# EAGLE board circuito_tesi (EAGLE 9.6.2)
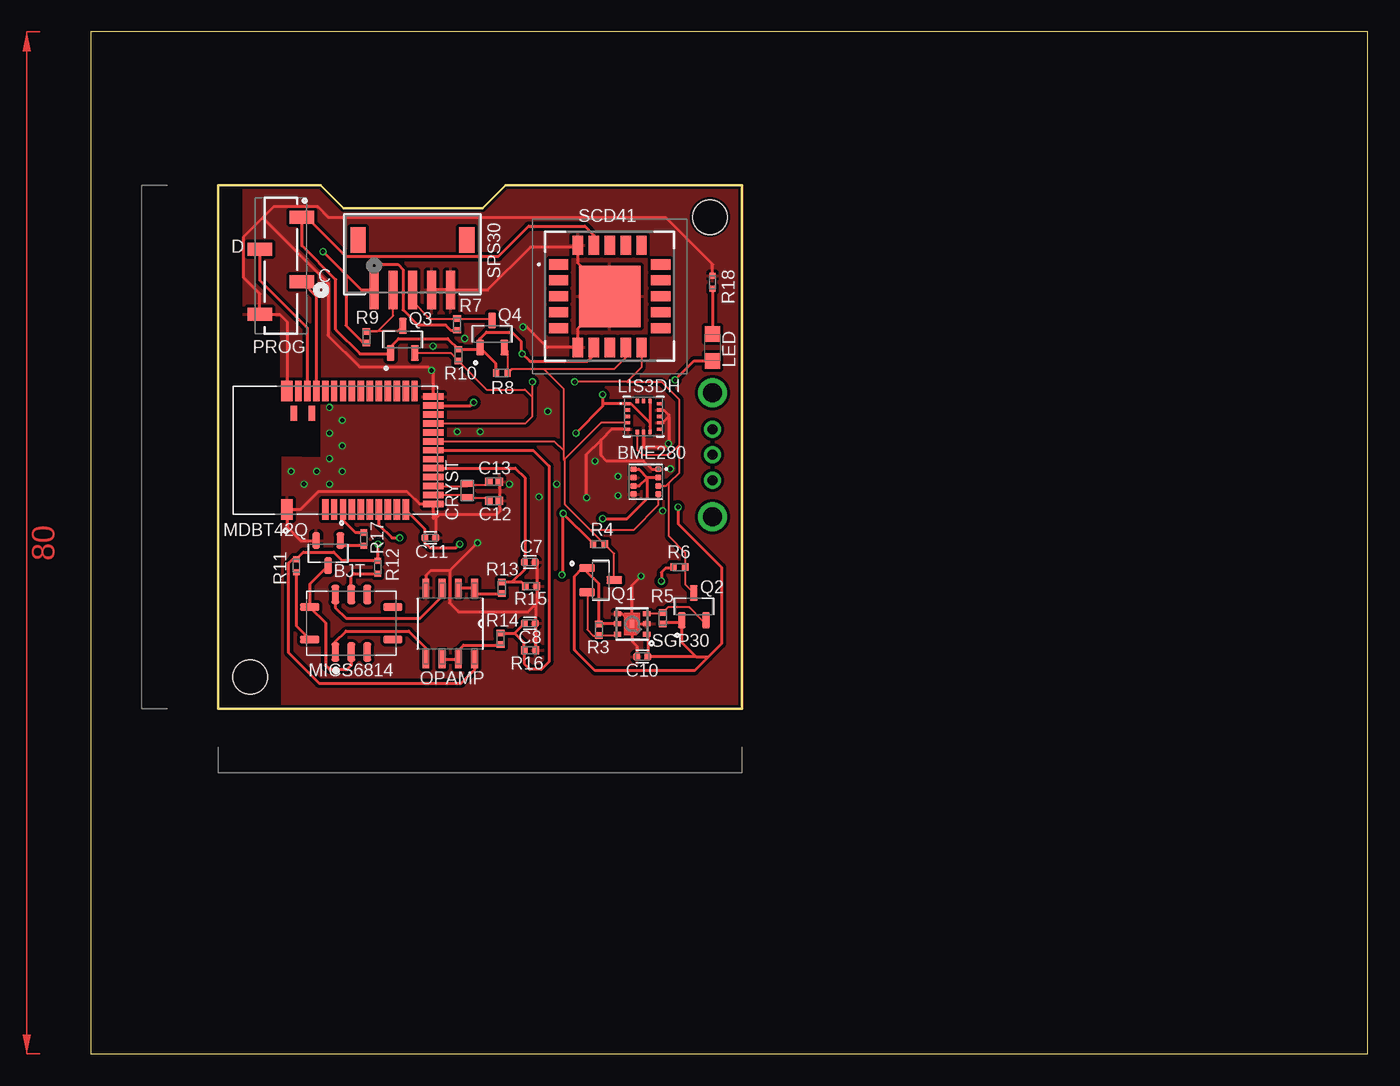
[diagram p0: board, top side]
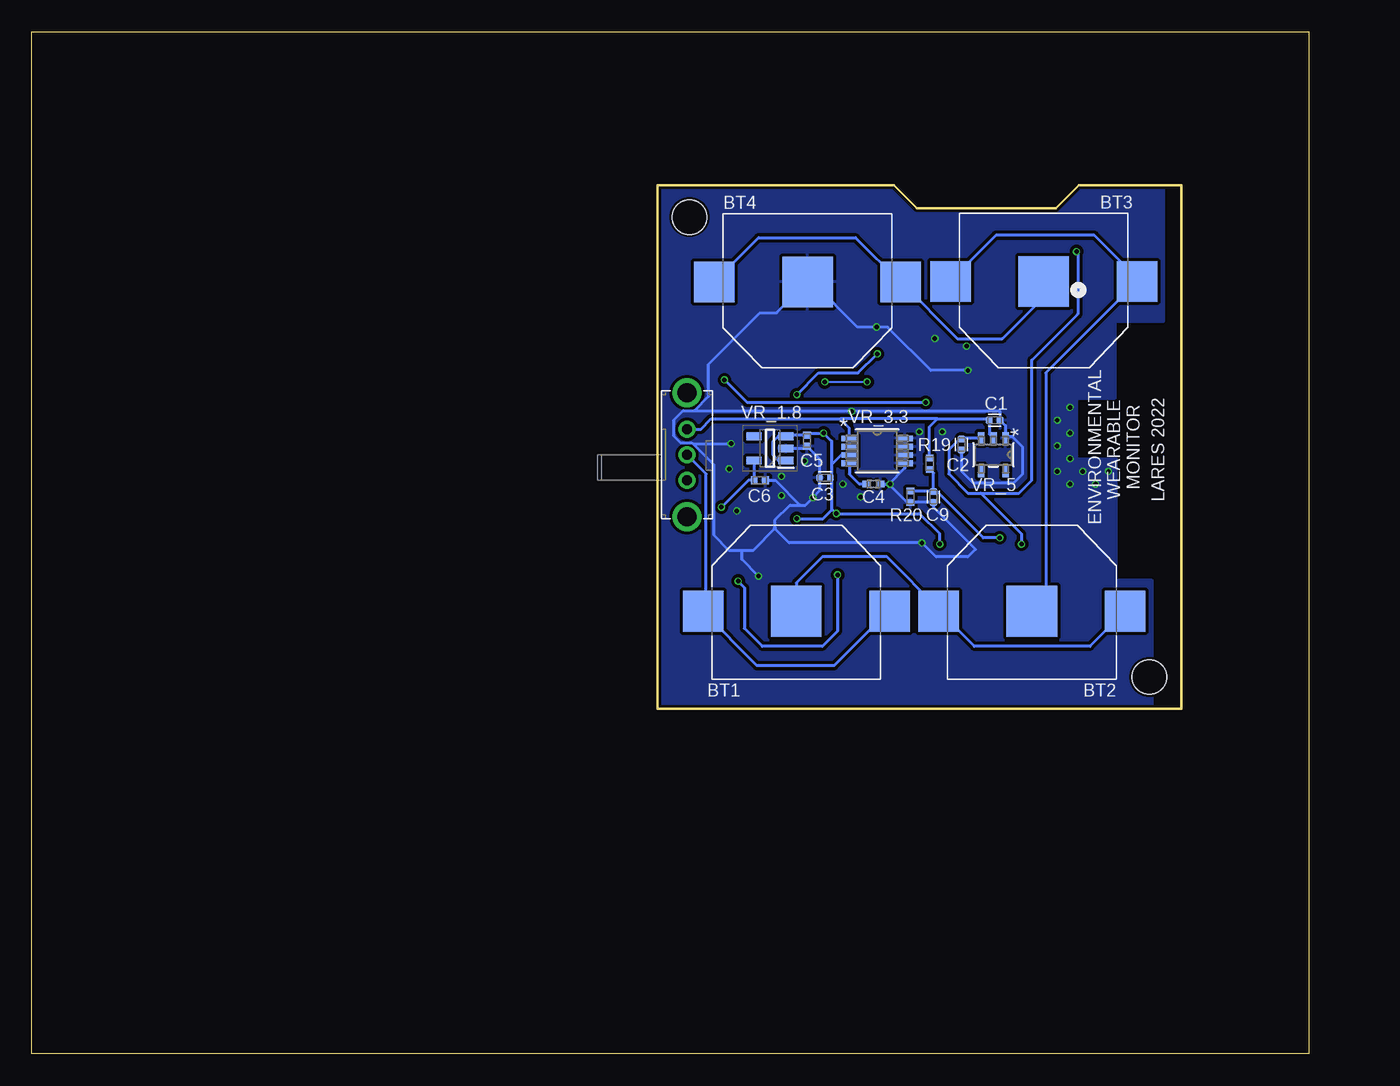
[diagram p1: board, bottom side, seen from below]

Size 100 x 80 mm. Coordinates in mm from the lower left corner, seen from the top.
Outline: 0,0 100,0 100,80 0,80 0,0
Outline: 10,68 10,27 51,27 51,68 32.5,68 30.7,66.2 19.8,66.2 18,68 10,68
Copper layers (1+2*15+16): Top 0.035mm / dielectric 0.18mm / layer 2 0.017mm / dielectric 1.12mm / layer 15 0.017mm / dielectric 0.18mm / Bottom 0.035mm
Design rules "DRC May 2022": minimum track width 3.5mil, minimum drill 0.35mm, track to track 0.25mm, track to pad 0.14mm, pad to pad 0.14mm, via to via 0.14mm, smd to smd 0.14mm, copper to edge 0.201mm, drill to drill 6mil, minimum pad ring 10mil, minimum via ring 0.1mm, stop-mask expansion 0.014mm, vias tented up to drill 1mm, thermal gap 10mil
Holes 2.7 mm at 12.5,29.5 48.5,65.5

## Footprints (pad centres in the part's own frame; a part is rotated, then mirrored left to right if it is on the bottom)
SOT95P230X110-3N = smd 1.26 x 0.59: 1 -0.98,0.95; 2 -0.98,-0.95; 3 0.98,0
PSON65P250X250X100-8N = smd 0.49 x 0.45: 1 0.97,0.975; 2 0.97,0.325; 3 0.97,-0.325; 4 0.97,-0.975; 5 -0.97,-0.975; 6 -0.97,-0.325; 7 -0.97,0.325; 8 -0.97,0.975
BAT_2996TR = smd 3.96 x 3.96: - 0,0 | smd 3.18 x 3.18: S+1 -7.3,0; S+2 7.3,0
CAPC1005X55N = smd 0.54 x 0.6: 1 -0.43,0; 2 0.43,0
CAP_CL05_SAM = smd 0.606 x 0.5: 1 -0.553,0; 2 0.553,0
CAPC1005X55N' = smd 0.54 x 0.6: 1 -0.432,0; 2 0.432,0
CAPC1005X56N = smd 0.59 x 0.63: 1 -0.42,0; 2 0.42,0
XTAL_ECS-.327-9-16-TR = smd 0.5 x 1: 1 -0.55,0; 2 0.55,0
DIOC200X125X110 = smd 1.2 x 1.2: + 1.05,0; - -1.05,0
STMICROELECTRONICS_LIS3DH_0 = smd 0.35 x 0.25: 1 -1.225,1; 2 -1.225,0.5; 3 -1.225,0; 4 -1.225,-0.5; 5 -1.225,-1; 9 1.225,-1; 10 1.225,-0.5; 11 1.225,0; 12 1.225,0.5; 13 1.225,1 | smd 0.25 x 0.35: 6 -0.5,-1.225; 7 0,-1.225; 8 0.5,-1.225; 14 0.5,1.225; 15 0,1.225; 16 -0.5,1.225
XCVR_317030213 = smd 1.6 x 0.9: 1 -4.65,3.8; 39 4.65,3.8 | smd 1.6 x 0.5: 2 -4.65,0.8; 3 -4.65,0.1; 4 -4.65,-0.6; 5 -4.65,-1.3; 6 -4.65,-2; 7 -4.65,-2.7; 8 -4.65,-3.4; 9 -4.65,-4.1; 10 -4.65,-4.8; 11 -4.65,-5.5; 25 4.65,-6.2; 26 4.65,-5.5; 27 4.65,-4.8; 28 4.65,-4.1; 29 4.65,-3.4; 30 4.65,-2.7; 31 4.65,-2; 32 4.65,-1.3; 33 4.65,-0.6; 34 4.65,0.1; 35 4.65,0.8; 36 4.65,1.5; 37 4.65,2.2; 38 4.65,2.9 | smd 0.5 x 1.6: 12 -4.2,-7.65; 13 -3.5,-7.65; 14 -2.8,-7.65; 15 -2.1,-7.65; 16 -1.4,-7.65; 17 -0.7,-7.65; 18 0,-7.65; 19 0.7,-7.65; 20 1.4,-7.65; 21 2.1,-7.65; 22 2.8,-7.65; 23 3.5,-7.65; 24 4.2,-7.65 | smd 1.2 x 0.5: 40 2.9,3.25; 41 2.9,1.85
SENSOR_MICS-6814 = smd 1.5 x 0.6: A -2.25,1.25; B -2.25,0; C -2.25,-1.25; F 2.25,-1.25; G 2.25,0; H 2.25,1.25 | smd 0.6 x 1.5: D -1.27,-3.25; E 1.27,-3.25; J 1.27,3.25; K -1.27,3.25
SOIC127P600X175-8N = smd 1.422 x 0.533: 1 -2.794,1.905; 2 -2.794,0.635; 3 -2.794,-0.635; 4 -2.794,-1.905; 5 2.794,-1.905; 6 2.794,-0.635; 7 2.794,0.635; 8 2.794,1.905
GCT_BG306-04-A-1-0400-X-X_REVD = smd 1.02 x 1.9: 1 -3.81,1.65; 2 -1.27,-1.65; 3 1.27,1.65; 4 3.81,-1.65
SOT95P240X111-3N = smd 1.23 x 0.6: 1 -1.06,0.95; 2 -1.06,-0.95; 3 1.06,0
RESC1005X37N = smd 0.49 x 0.6: 1 -0.457,0; 2 0.457,0
RES_ERJPA2F1300X = smd 0.475 x 0.5: 1 -0.512,0; 2 0.512,0
RES_ERJPA2J821X = smd 0.475 x 0.5: 1 -0.512,0; 2 0.512,0
RESC1005X40N = smd 0.51 x 0.6: 1 -0.445,0; 2 0.445,0
RES_ERJPA2F5101X = smd 0.475 x 0.5: 1 -0.512,0; 2 0.512,0
RES_ERA2AEB331X = smd 0.475 x 0.5: 1 -0.512,0; 2 0.512,0
SW_EG1213 = drill 0.8: 1 -2,0; 2 0,0; 3 2,0 | drill 1.5: P$4 -4.85,0; P$5 4.85,0
SCD41DR2 = smd 1.5 x 0.8: 1 -4,2.5; 2 -4,1.25; 3 -4,0; 4 -4,-1.25; 5 -4,-2.5; 11 4,-2.5; 12 4,-1.25; 13 4,0; 14 4,1.25; 15 4,2.5 | smd 0.8 x 1.5: 6 -2.5,-4; 7 -1.25,-4; 8 0,-4; 9 1.25,-4; 10 2.5,-4; 16 2.5,4; 17 1.25,4; 18 0,4; 19 -1.25,4; 20 -2.5,4 | smd 4.8 x 4.8: 21 0,0
SGP30 = smd 0.55 x 0.4: 1 -1.15,0.8; 2 -1.15,0; 3 -1.15,-0.8; 4 1.15,-0.8; 5 1.15,0; 6 1.15,0.8 | smd 0.305 x 0.61: DIEPAD 0,0
CONN_S5B-ZR-SM4A-TF_JST = smd 0.711 x 2.997: 1 0,0; 2 1.5,0; 3 3,0; 4 4.5,0; 5 6,0 | smd 1.194 x 2.007: 6 -1.25,3.902; 7 7.25,3.902
SOT95P275X130-5N = smd 1.2 x 0.6: 1 -1.25,0.95; 2 -1.25,0; 3 -1.25,-0.95; 4 1.25,-0.95; 5 1.25,0.95
MSOP-8LD-PL-1_MCH = smd 1.257 x 0.457: 1 -2.178,0.975; 2 -2.178,0.325; 3 -2.178,-0.325; 4 -2.178,-0.975; 5 2.178,-0.975; 6 2.178,-0.325; 7 2.178,0.325; 8 2.178,0.975
TSOT23-5_ONS = smd 0.953 x 0.508: 1 -1.276,0.95; 2 -1.276,0; 3 -1.276,-0.95; 4 1.276,-0.95; 5 1.276,0.95

## Placement (x,y rotation side)
BJT  MMBT3904-215  [SOT95P230X110-3N]  18.6,39.2 270 top
BME280  BME280  [PSON65P250X250X100-8N]  43.48,44.79 0 top
BT1  2996TR  [BAT_2996TR]  40.14,34.65 180 bottom
BT2  2996TR  [BAT_2996TR]  21.69,34.65 180 bottom
BT3  2996TR  [BAT_2996TR]  20.76,60.45 0 bottom
BT4  2996TR  [BAT_2996TR]  39.26,60.43 0 bottom
C1  C0402C104K9RACAUTO  [CAPC1005X55N]  24.6,49.6 0 bottom
C2  C0402C104K9RACAUTO  [CAPC1005X55N]  27.2,47.7 270 bottom
C3  CL05A225MQ5NNNC  [CAPC1005X55N]  37.9,45.1 180 bottom
C4  CL05B471KB5NNNCCAP_CL05_SAM  [CAP_CL05_SAM]  34.1,44.6 180 bottom
C5  JMK105BJ105KV-F  [CAPC1005X55N']  39.3,48 90 bottom
C6  JMK105BJ105KV-F  [CAPC1005X55N']  43,44.9 180 bottom
C7  CL05B103KO5NNNC  [CAPC1005X55N]  34.4,38.5 180 top
C8  CL05B103KO5NNNC  [CAPC1005X55N]  34.4,33.7 0 top
C9  CL05B103KO5NNNC  [CAPC1005X55N]  29.4,43.6 270 bottom
C10  C0402C104K9RACAUTO  [CAPC1005X55N]  43.2,31.1 0 top
C11  CL05A106MP5NUNC  [CAPC1005X55N]  26.6,40.4 180 top
C12  04025A120FAT2A  [CAPC1005X56N]  31.6,43.3 180 top
C13  04025A120FAT2A  [CAPC1005X56N]  31.6,44.8 180 top
CRYST  ECS-.327-9-16-TR  [XTAL_ECS-.327-9-16-TR]  29.5,44.1 270 top
LED  LTST-C170KRKT  [DIOC200X125X110]  48.7,55.3 270 top
LIS3DH  STMICROELECTRONICS_LIS3DHSTMICROELECTRONICS_LIS3DH_0_0  [STMICROELECTRONICS_LIS3DH_0]  43.3,49.9 0 top
MDBT42Q  317030213  [XCVR_317030213]  19.17,47.25 90 top
MICS6814  MICS-6814  [SENSOR_MICS-6814]  20.41,33.71 90 top
OPAMP  TSV912IDT  [SOIC127P600X175-8N]  28.16,33.68 270 top
PROG  BG306-04-A-1-0400-X-X_REVD  [GCT_BG306-04-A-1-0400-X-X_REVD]  14.9,61.7 270 top
Q1  BSS138  [SOT95P240X111-3N]  39.94,37.09 0 top
Q2  BSS138  [SOT95P240X111-3N]  47.24,35.01 90 top
Q3  BSS138  [SOT95P240X111-3N]  24.44,55.93 90 top
Q4  BSS138  [SOT95P240X111-3N]  31.44,56.35 90 top
R3  MCS0402MC1002FE000  [RESC1005X37N]  39.8,33.2 270 top
R4  MCS0402MC1002FE000  [RESC1005X37N]  39.8,39.9 0 top
R5  MCS0402MC1002FE000  [RESC1005X37N]  44.8,34.1 270 top
R6  MCS0402MC1002FE000  [RESC1005X37N]  46.1,38.1 180 top
R7  MCS0402MC1002FE000  [RESC1005X37N]  28.7,57.1 90 top
R8  MCS0402MC1002FE000  [RESC1005X37N]  32.2,53.3 0 top
R9  MCS0402MC1002FE000  [RESC1005X37N]  21.6,56.1 270 top
R10  MCS0402MC1002FE000  [RESC1005X37N]  28.8,54.7 90 top
R11  ERJPA2F1300X  [RES_ERJPA2F1300X]  16.1,38.2 90 top
R12  ERJPA2J821X  [RES_ERJPA2J821X]  22.5,38.1 90 top
R13  ERJ-2GEJ515X  [RESC1005X40N]  32.2,36.5 270 top
R14  ERJ-2GEJ515X  [RESC1005X40N]  32.1,32.5 270 top
R15  ERJ-2GEJ106X  [RESC1005X40N]  34.5,36.6 0 top
R16  ERJ-2GEJ106X  [RESC1005X40N]  34.4,31.6 180 top
R17  ERJPA2F5101X  [RES_ERJPA2F5101X]  21.4,40.3 270 top
R18  ERA2AEB331X  [RES_ERA2AEB331X]  48.7,60.4 270 top
R19  ERJ-2GEJ515X  [RESC1005X40N]  29.7,46.2 270 bottom
R20  ERJ-2GEJ515X  [RESC1005X40N]  31.2,43.6 90 bottom
S1  EG1213  [SW_EG1213]  48.7,46.9 270 bottom
SCD41  SCD41-D-R2  [SCD41DR2]  40.65,59.3 0 top
SGP30  SGP30  [SGP30]  42.4,33.66 180 top
SPS30  S5B-ZR-SM4A-TF_(LF)_(SN)CONN_S5B-ZR-SM4A-TF_JST  [CONN_S5B-ZR-SM4A-TF_JST]  22.2,59.8 0 top
VR_1.8  S-1318D18-M5T1U4  [SOT95P275X130-5N]  42.2,47.4 180 bottom
VR_3.3  MIC5219-3.3YMMMSOP-8LD-PL-1_MCH  [MSOP-8LD-PL-1_MCH]  33.8,47.2 0 bottom
VR_5  MC78LC50NTRGTSOT23-5_ONS  [TSOT23-5_ONS]  24.7,46.9 270 bottom

## Library data of the parts
BJT = BJT_TO-236; DESCRIPTION: Bipolar (BJT) Transistor NPN 40 V 200 mA 300MHz 250 mW Surface Mount TO-236AB; DIGI-KEY_PART_NUMBER: 1727-4044-2-ND; MF: Nexperia USA; MP: MMBT3904,215; PACKAGE: SOT23-3 Nexperia USA Inc.; PURCHASE-URL: https://pricing.snapeda.com/search/part/MMBT3904,215/?ref=eda
BME280 = BME280; AVAILABILITY: In Stock; DESCRIPTION: Board Mount Humidity Sensors MEMS humidity, pressure and temperature sensor; MF: Bosch; MP: BME280; PACKAGE: LGA-8 Bosch; PRICE: None; PURCHASE-URL: https://pricing.snapeda.com/search/part/BME280/?ref=eda
BT1-BT4 = Battery_holder; DESCRIPTION: SMT Holder for 11.6mm Cell-Tin Nickel Plated on T&R; DIGI-KEY_PART_NUMBER: 36-2996TR-ND; MF: Keystone Electronics; MP: 2996TR; PACKAGE: None; PURCHASE-URL: https://pricing.snapeda.com/search/part/2996TR/?ref=eda
C1 C2 C10 = Cond_100n_0402; DESCRIPTION: 0.1 µF ±10% 6.3V Ceramic Capacitor X7R 0402 (1005 Metric); DIGI-KEY_PART_NUMBER: 399-19367-2-ND; MF: KEMET; MP: C0402C104K9RACAUTO; PACKAGE: 0402 KEMET; PURCHASE-URL: https://pricing.snapeda.com/search/part/C0402C104K9RACAUTO/?ref=eda
C3 = Cond_2,2u_0402; DESCRIPTION: 2.2 µF ±20% 6.3V Ceramic Capacitor X5R 0402 (1005 Metric); DIGI-KEY_PART_NUMBER: 1276-1469-2-ND; MF: Samsung; MP: CL05A225MQ5NNNC; PACKAGE: 0402 Samsung; PURCHASE-URL: https://pricing.snapeda.com/search/part/CL05A225MQ5NNNC/?ref=eda
C4 = Cond_470p_0402; COPYRIGHT: Copyright (C) 2022 Ultra Librarian. All rights reserved.; DIGI-KEY_PART_NUMBER_1: 1276-1566-2-ND; DIGI-KEY_PART_NUMBER_2: 1276-1566-1-ND; DIGI-KEY_PART_NUMBER_3: 1276-1566-6-ND; MANUFACTURER_PART_NUMBER: CL05B471KB5NNNC; MFR_NAME: Samsung
C5 C6 = Cond_1u_0402; DESCRIPTION: 1 µF ±10% 6.3V Ceramic Capacitor X5R 0402 (1005 Metric); DIGI-KEY_PART_NUMBER: 587-1231-2-ND; MF: Taiyo Yuden; MP: JMK105BJ105KV-F; PACKAGE: 1005 Taiyo Yuden; PURCHASE-URL: https://pricing.snapeda.com/search/part/JMK105BJ105KV-F/?ref=eda
C7-C9 = Cond_10n_0402; DESCRIPTION: 10000 pF ±10% 16V Ceramic Capacitor X7R 0402 (1005 Metric); DIGI-KEY_PART_NUMBER: 1276-1051-2-ND; MF: Samsung Electro-Mechanics; MP: CL05B103KO5NNNC; PACKAGE: 0402 Samsung; PURCHASE-URL: https://pricing.snapeda.com/search/part/CL05B103KO5NNNC/?ref=eda
C11 = Cond_10u_0402; DESCRIPTION: 10 µF ±20% 10V Ceramic Capacitor X5R 0402 (1005 Metric); DIGI-KEY_PART_NUMBER: 1276-1450-2-ND; MF: Samsung; MP: CL05A106MP5NUNC; PACKAGE: 0402 Samsung; PURCHASE-URL: https://pricing.snapeda.com/search/part/CL05A106MP5NUNC/?ref=eda
C12 C13 = Cond_12p_0402; DESCRIPTION: 12 pF ±1% 50V Ceramic Capacitor C0G, NP0 0402 (1005 Metric); DIGI-KEY_PART_NUMBER: 478-10087-2-ND; MF: AVX; MP: 04025A120FAT2A; PACKAGE: 1005 AVX; PURCHASE-URL: https://pricing.snapeda.com/search/part/04025A120FAT2A/?ref=eda
CRYST = Crystal-ECS-.327-9-16-TR; DESCRIPTION: 32.768 kHz ±20ppm Crystal 9pF 90 kOhms 2-SMD, No Lead; DIGI-KEY_PART_NUMBER: XC2132TR-ND; MF: ECS Inc.; MP: ECS-.327-9-16-TR; PACKAGE: SMD-2 ECS International; PURCHASE-URL: https://pricing.snapeda.com/search/part/ECS-.327-9-16-TR/?ref=eda
LED = LED_R_LTST-C170KRKT; DESCRIPTION: Red 631nm LED Indication - Discrete 2V 0805 (2012 Metric); DIGI-KEY_PART_NUMBER: 160-1415-2-ND; MF: Lite-On Inc.; MP: LTST-C170KRKT; PACKAGE: None; PURCHASE-URL: https://pricing.snapeda.com/search/part/LTST-C170KRKT/?ref=eda
LIS3DH = STMicroelectronics - LIS3DH; BANDWIDTH: 5 kHz; CIIVA_IDS: 978556; COMPONENT_LINK_1_DESCRIPTION: Manufacturer URL; COMPONENT_LINK_1_URL: http://www.st.com/; COMPONENT_LINK_3_DESCRIPTION: Package Specification; COMPONENT_LINK_3_URL: http://www.st.com/st-web-ui/static/active/en/resource/technical/document/datasheet/CD00274221.pdf; CURRENT_CONSUMPTION_IN_POWER_DOWN_MODE: 0.5 uA; DATASHEET: http://www.st.com/st-web-ui/static/active/en/resource/technical/document/datasheet/CD00274221.pdf; DATASHEET_VERSION: Rev. 1; FOOTPRINT_VARIANT_NAME_0: Manufacturer Recommended; IMPORTED: yes; IMPORTED_FROM: vault; IMPORT_TS: 1521860055; INTERFACE: I2C, SPI; MF: STMicroelectronics; MOUNTING_TECHNOLOGY: Surface Mount; MPN: LIS3DH; OPERATING_TEMPERATURE: -40 to 85 degC; OUTPUT_TYPE: Digital; PACKAGE: LGA-16; PACKAGE_DESCRIPTION: 16-Pin Land Grid Array, Body 3 x 3 mm, Pitch 0.5 mm; PACKING: Tray; PIN_0_0_3_INSIDE_EDGE: clock; PREFIX: U; RELEASE_DATE: 1506332602; ROHS: Yes; VAULT_GUID: 35EBCE1D-2944-446E-95F1-4BAFD91B2D9D; VAULT_REVISION: 2E44ACB8-410E-4D5A-8B6F-2E9483856AF3; WIDE_SUPPLY_VOLTAGE: 1.71 to 3.6 V
MDBT42Q = Raytac_nRF52; DESCRIPTION: Bluetooth Bluetooth v4.2 Transceiver Module 2.4GHz Integrated, Chip Surface Mount; DIGI-KEY_PART_NUMBER: 1597-1434-ND; MF: Seeed Technology; MP: 317030213; PACKAGE: SMD-41 Seeed Studio; PURCHASE-URL: https://pricing.snapeda.com/search/part/317030213/?ref=eda
MICS6814 = MICS-6814; AVAILABILITY: Not in stock; DESCRIPTION: MiCS-6814 Air Quality Sensor mikroBUS™ Click™ Platform Evaluation Expansion Board; MF: MikroElektronika; MP: MICS-6814; PACKAGE: None; PRICE: None
OPAMP = Opamp_SMD; AVAILABILITY: In Stock; DESCRIPTION: General Purpose Amplifier 2 Circuit Rail-to-Rail 8-SOIC; MF: STMicroelectronics; MP: TSV912IDT; PACKAGE: SOIC-8 STMicroelectronics; PRICE: None; PURCHASE-URL: https://pricing.snapeda.com/search/part/TSV912IDT/?ref=eda
PROG = Connet_6_BG306-04-A-1-0400-X-X_REVD; DESCRIPTION: 4 Position Receptacle Connector 0.100 (2.54mm) Surface Mount Gold; DIGI-KEY_PART_NUMBER: 2073-BG306-04-A-1-0400-L-BTR-ND; MF: Global Connector Technology; MP: BG306-04-A-1-0400-L-B; PACKAGE: None; PURCHASE-URL: https://pricing.snapeda.com/search/part/BG306-04-A-1-0400-L-B/?ref=eda
Q1-Q4 = BSS138; DESCRIPTION: N-Channel 50 V 200mA (Ta) 225mW (Ta) Surface Mount SOT-23-3 (TO-236); DIGI-KEY_PART_NUMBER: BSS138TR-ND; MF: ON Semiconductor; MP: BSS138; PACKAGE: SOT-23 ON; PURCHASE-URL: https://pricing.snapeda.com/search/part/BSS138/?ref=eda
R3-R10 = Res_10K_0402; DESCRIPTION: 10 kOhms ±1% 0.1W, 1/10W Chip Resistor 0402 (1005 Metric) Anti-Sulfur, Automotive AEC-Q200 Thin Film; DIGI-KEY_PART_NUMBER: MCS0402-10.0K-MFTR-ND; MF: Vishay Beyschlag; MP: MCS0402MC1002FE000; PACKAGE: 1005 Vishay; PURCHASE-URL: https://pricing.snapeda.com/search/part/MCS0402MC1002FE000/?ref=eda
R11 = Res_130_0402; DESCRIPTION: 130 Ohms ±1% 0.2W, 1/5W Chip Resistor 0402 (1005 Metric) Automotive AEC-Q200, Pulse Withstanding Thick Film; DIGI-KEY_PART_NUMBER: P124437TR-ND; MF: Panasonic; MP: ERJPA2F1300X; PACKAGE: 1005-2 Panasonic; PURCHASE-URL: https://pricing.snapeda.com/search/part/ERJPA2F1300X/?ref=eda
R12 = Res_820_0402; DESCRIPTION: Res Thick Film 0402 820 Ohm 5% 0.2W(1/5W) ±200ppm/°C Pad SMD Automotive T/R; DIGI-KEY_PART_NUMBER: P124598TR-ND; MF: Panasonic; MP: ERJPA2J821X; PACKAGE: 1005-2 Panasonic; PURCHASE-URL: https://pricing.snapeda.com/search/part/ERJPA2J821X/?ref=eda
R13 R14 R19 R20 = Res_5,1M_0402; DESCRIPTION: 5.1 MOhms ±5% 0.1W, 1/10W Chip Resistor 0402 (1005 Metric) Automotive AEC-Q200 Thick Film; DIGI-KEY_PART_NUMBER: P5.1MJTR-ND; MF: Panasonic; MP: ERJ-2GEJ515X; PACKAGE: 1005 Panasonic Electronic Components; PURCHASE-URL: https://pricing.snapeda.com/search/part/ERJ-2GEJ515X/?ref=eda
R15 R16 = Res_10M_0402; DESCRIPTION: Res Thick Film 0402 10M Ohm 5% 1/10W -400ppm/°C to 150ppm/°C Molded SMD Punched Carrier T/R; DIGI-KEY_PART_NUMBER: P10MJTR-ND; MF: Panasonic Electronic; MP: ERJ-2GEJ106X; PACKAGE: 1005 Panasonic Electronic Components; PURCHASE-URL: https://pricing.snapeda.com/search/part/ERJ-2GEJ106X/?ref=eda
R17 = Res_5,1K_0402; DESCRIPTION: 5.1 kOhms ±1% 0.2W, 1/5W Chip Resistor 0402 (1005 Metric) Automotive AEC-Q200, Pulse Withstanding Thick Film; DIGI-KEY_PART_NUMBER: P124488TR-ND; MF: Panasonic; MP: ERJPA2F5101X; PACKAGE: 1005-2 Panasonic; PURCHASE-URL: https://pricing.snapeda.com/search/part/ERJPA2F5101X/?ref=eda
R18 = Res_330_0402; DESCRIPTION: 330 Ohms ±0.1% 0.063W, 1/16W Chip Resistor 0402 (1005 Metric) Automotive AEC-Q200 Thin Film; DIGI-KEY_PART_NUMBER: P330DCTR-ND; MF: Panasonic; MP: ERA2AEB331X; PACKAGE: 1005-2 Panasonic
S1 = switch_TH_HO; DESCRIPTION: Slide Switch SPDT Through Hole, Right Angle; DIGI-KEY_PART_NUMBER: EG1906-ND; MF: E-Switch; MP: EG1213; PACKAGE: None; PURCHASE-URL: https://pricing.snapeda.com/search/part/EG1213/?ref=eda
SCD41 = SCD41-R2_unofficial; ARROW_PART_NUMBER: SCD41-D-R2; ARROW_PRICE-STOCK: https://www.arrow.com/en/products/scd41-d-r2/sensirion-ag?region=nac; DESCRIPTION: Air Quality Sensor CO2 Sensor 2.5V/3.3V/5V 20-Pin SMD EP; HEIGHT: 6.8mm; MANUFACTURER_NAME: Sensirion; MANUFACTURER_PART_NUMBER: SCD41-D-R2; MOUSER_PART_NUMBER: 403-SCD41-D-R2; MOUSER_PRICE-STOCK: https://www.mouser.co.uk/ProductDetail/Sensirion/SCD41-D-R2?qs=HBWAp0VN4Ri4o7ei4T3s0g%3D%3D
SGP30 = SGP30; AVAILABILITY: In Stock; DESCRIPTION: SGP30, SHTC1 Air Quality, Humidity, Temperature Sensor Arduino Platform Evaluation Expansion Board; MF: Sensirion AG; MP: SGP30; PACKAGE: None; PRICE: None; PURCHASE-URL: https://pricing.snapeda.com/search/part/SGP30/?ref=eda
SPS30 = CONN_SMD_5PIN; COPYRIGHT: Copyright (C) 2022 Ultra Librarian. All rights reserved.; DIGI-KEY_PART_NUMBER_1: 455-1696-2-ND; DIGI-KEY_PART_NUMBER_2: 455-1696-1-ND; DIGI-KEY_PART_NUMBER_3: 455-1696-6-ND; MANUFACTURER_PART_NUMBER: S5B-ZR-SM4A-TF (LF) (SN); MFR_NAME: JST
VR_1.8 = VOLT_REG_1.8_SOT-23-5; DESCRIPTION: IC REG LINEAR 1.8V 100MA SOT23-5; HEIGHT: 1.3mm; MANUFACTURER_NAME: ABLIC Inc.; MANUFACTURER_PART_NUMBER: S-1318D18-M5T1U4; MOUSER_PART_NUMBER: 628-S-1318D18-M5T1U4; MOUSER_PRICE-STOCK: https://www.mouser.co.uk/ProductDetail/ABLIC/S-1318D18-M5T1U4/?qs=bZr6mbWTK5mVILZBDijY2w%3D%3D
VR_3.3 = Volt_Reg_3.3_8MSOP; COPYRIGHT: Copyright (C) 2022 Ultra Librarian. All rights reserved.; DIGI-KEY_PART_NUMBER_1: 576-1827-5-ND; MANUFACTURER_PART_NUMBER: MIC5219-3.3YMM; MFR_NAME: Microchip
VR_5 = VOLT_REG_5V_SOT-23-5; COPYRIGHT: Copyright (C) 2022 Ultra Librarian. All rights reserved.; DIGI-KEY_PART_NUMBER_1: 2156-MC78LC50NTRG-OS-ND; DIGI-KEY_PART_NUMBER_2: =MC78LC50NTRG; DIGI-KEY_PART_NUMBER_3: MC78LC50NTRGOSCT-ND; DIGI-KEY_PART_NUMBER_4: MC78LC50NTRGOSDKR-ND; DIGI-KEY_PART_NUMBER_5: MC78LC50NTRGOSTR-ND; MANUFACTURER_PART_NUMBER: MC78LC50NTRG; MFR_NAME: onsemi

## Nets
1.8V: C6.2 C10.2 Q1.1 Q2.1 R3.1 R5.2 SGP30.1 SGP30.5 VR_1.8.5
3.3V: BME280.2 BME280.6 BME280.8 C3.1 C5.2 C11.2 LIS3DH.1 LIS3DH.8 LIS3DH.14 MDBT42Q.11 PROG.1 Q3.1 Q4.1 R4.1 R6.2 R8.1 R10.2 SCD41.7 SCD41.19 VR_1.8.1 VR_1.8.3 VR_3.3.3
5V: C2.1 OPAMP.8 R7.1 R9.2 R11.2 R12.2 SPS30.1 VR_5.3
AIN1: C7.2 MDBT42Q.16 R13.1 R15.1
AIN3: C8.1 MDBT42Q.18 R14.1 R16.2
BATTERY: C9.1 MDBT42Q.8 R19.2 R20.2
BJT: BJT.3 MICS6814.B MICS6814.J
DCC: MDBT42Q.10
DEC4: MDBT42Q.9
GND: BJT.2 BME280.1 BME280.5 BME280.7 BT4.- C1.2 C2.2 C3.2 C4.1 C5.1 C6.1 C7.1 C8.2 C9.2 C10.1 C11.1 C12.1 C13.1 LIS3DH.5 LIS3DH.7 LIS3DH.10 LIS3DH.12 MDBT42Q.1 MDBT42Q.12 MDBT42Q.24 MDBT42Q.39 OPAMP.4 PROG.4 R15.2 R16.1 R18.1 R20.1 SCD41.6 SCD41.20 SCD41.21 SGP30.2 SGP30.4 SGP30.DIEPAD SPS30.4 SPS30.5 VR_1.8.2 VR_3.3.5 VR_3.3.6 VR_3.3.7 VR_3.3.8 VR_5.1
LED: LED.+ MDBT42Q.23
N$2: BT1.- BT2.S+1 BT2.S+2
N$4: BT2.- BT3.S+1 BT3.S+2
N$6: MICS6814.A OPAMP.5
N$7: OPAMP.6 OPAMP.7 R14.2
N$8: OPAMP.1 OPAMP.2 R13.2
N$9: LED.- R18.2
N$10: MICS6814.H OPAMP.3
N$11: MICS6814.G R12.1
N$13: MICS6814.K R11.1
N$14: C4.2 VR_3.3.4
N$15: BJT.1 R17.2
N$17: C12.2 CRYST.2 MDBT42Q.13
N$18: C13.2 CRYST.1 MDBT42Q.14
N$25: BT3.- BT4.S+1 BT4.S+2
N$27: BT1.S+1 BT1.S+2 S1.2
P8: MDBT42Q.4 R17.1
SCL: BME280.4 LIS3DH.4 MDBT42Q.19 Q1.3 Q4.2 R4.2 R8.2 SCD41.9
SCL5: Q4.3 R7.2 SPS30.3
SCL18: Q1.2 R3.2 SGP30.6
SDA: BME280.3 LIS3DH.6 MDBT42Q.21 Q2.3 Q3.2 R6.1 R10.1 SCD41.10
SDA5: Q3.3 R9.1 SPS30.2
SDA18: Q2.2 R5.1 SGP30.3
SWDCLK: MDBT42Q.36 PROG.3
SWDIO: MDBT42Q.37 PROG.2
VDD: C1.1 R19.1 S1.1 VR_3.3.1 VR_3.3.2 VR_5.2

## Tracks (layer width: path | path; a pad name or v marks a point on that pad's centre or on a via)
1.8V  (via drill 0.35)
  Top 0.254: v46,42.8 46,41.5 49.4,38.1 49.4,32.1 48.4,31.1 | 47.4,31.1 C10.2 43.63,32.78 SGP30.1 | SGP30.5 R3.1 39.77,33.68 39.77,36.83 38.88,37.72 Q1.1 38.54,38.04 37.9,37.4 37.9,31.6 39.5,30 47.3,30 48.4,31.1 | R5.2 44.9,33.74 46.08,33.74 Q2.1 46.29,32.21 47.4,31.1 | 47.4,31.1 48.4,31.1
  Bottom 0.254: VR_1.8.5 43.45,44.92 C6.2 43.9,44.9 v46,42.8
3.3V  (via drill 0.35)
  Top 0.246: 43.8,49.1 LIS3DH.8
  Top 0.254: v44.7,37 44.7,37.7 45,38 45.54,38 R6.2 | v28.9,39.9 28.6,39.6 26.6,39.6 26.17,40.03 C11.2 26.17,41.1 MDBT42Q.11 | v36.9,37.5 36.94,37.54 36.94,42.24 v37,42.3 39.34,39.96 R4.1 | Q4.1 30.44,55.3 30.3,55.16 R10.2 27.97,55.99 24.11,55.99 23.49,55.37 Q3.1 23.42,54.8 21.1,54.8 19.2,56.7 19.2,60.6 16.55,63.25 PROG.1 16.9,65.51 20,62.41 31.91,62.41 34.3,64.8 38.7,64.8 39.4,64.1 SCD41.19 | R8.1 31.74,54.04 Q4.1 | SCD41.7 39.4,54.7 38.9,54.2 34.4,54.2 v33.8,54.8 33.7,54.9 33.7,55.8 33,56.5 31,56.5 30.49,55.99 Q4.1 | LIS3DH.14 43.8,49.4 | 43.8,49.4 43.8,49.1 | v40.1,41.9 42,41.9 43.6,43.5 43.6,45.12 | v40.1,51.6 40.1,50.9 | 40.1,50.9 40.1,50.7 v38,48.6 | 40.1,50.9 LIS3DH.1 42.3,50.9 43.8,49.4 | BME280.6 42.95,44.47 43.6,45.12 | BME280.8 42.94,45.77 43.59,45.12 43.6,45.12 | BME280.2 43.6,45.12
  Bottom 0.254: VR_3.3.3 36.62,46.88 37.37,46.13 | 37.37,46.13 37.37,47.97 v38,48.6 39.13,48.6 C5.2 40.87,48.43 VR_1.8.3 41.55,48.35 42,47.9 42,46.9 41.55,46.45 VR_1.8.1 | v40.1,51.6 38.4,53.3 35.3,53.3 v33.8,54.8 | v28.9,39.9 28.9,40.7 30.5,42.3 v37,42.3 37.37,42.67 | v36.9,37.5 36.9,33.1 38.1,31.9 42.8,31.9 44.2,33.3 44.2,36.5 v44.7,37 | 37.37,46.13 37.37,45.2 C3.1 37.37,45 37.37,42.67 | 37.37,42.67 37.37,42.57 38.04,41.9 v40.1,41.9
5V  (via drill 0.35)
  Top 0.254: v22.5,39.9 R12.2 19.69,38.61 19.03,39.27 16.66,39.27 R11.2 15.8,38.71 15.5,38.41 15.5,31.4 17.9,29 29,29 30.07,30.07 OPAMP.8 | 20,61 20,57 21.36,55.64 R9.2 | R7.1 28.2,56.64 27.8,57.04 25.66,57.04 24.46,58.23 24.46,61.4 24.07,61.8 22.6,61.8 22.2,61.4 SPS30.1 21.2,59.8 20,61 | v18.2,62.8 20,61
  Bottom 0.254: 25.7,43.9 22.5,40.7 v22.5,39.9 | VR_5.3 27.15,48.18 C2.1 27.37,48.13 28.2,47.3 28.2,45.4 26.7,43.9 25.7,43.9 | v18.2,62.8 18.1,62.7 18.1,57.9 21.7,54.3 21.7,44.9 22.7,43.9 25.7,43.9
AIN1
  Top 0.254: MDBT42Q.16 33.25,45.85 34,45.1 34,38.53 C7.2 33.97,37.91 33.01,36.95 | R13.1 33.01,36.95 | 33.01,36.95 33.71,36.95 R15.1
AIN3
  Top 0.254: MDBT42Q.18 34.65,47.25 35.9,46 35.9,30.7 35.3,30.1 34.4,30.1 33.95,30.55 R16.2 33.95,32.19 33.21,32.94 | R14.1 33.2,32.95 33.21,32.94 | 33.21,32.94 C8.1
BATTERY  (via drill 0.35)
  Top 0.254: MDBT42Q.8 22.57,41.43 23.6,40.4 v24.2,40.4
  Bottom 0.254: v24.2,40.4 25.5,40.4 29.13,44.03 C9.1 | R20.2 31.18,44.03 C9.1 | C9.1 29.4,45.45 R19.2
BJT
  Top 0.254: BJT.3 17.16,36.78 MICS6814.J 18.4,33.74 18.4,30.4 18.7,30.1 20.1,30.1 20.41,30.41 MICS6814.B
GND  (via drill 0.35, 0.35 pad 0.3)
  Top 0.254: SGP30.DIEPAD SGP30.2 | SPS30.4 SPS30.5 31.1,59.8 34.45,63.15 38,63.15 SCD41.20 38.15,61.9 40.75,59.3 SCD41.21 38.15,56.8 SCD41.6 35.76,55.3 34.16,56.9 v33.86,56.9 | v30.3,40 28.15,37.85 28,37.85 | R18.1 48.7,61.8 45.02,65.48 18.61,65.48 17.8,66.3 14.32,66.3 13.46,65.44 | BJT.2 16.45,40.18 15.37,41.26 MDBT42Q.1 16.4,42.6 17.8,44 24.8,44 25.75,43.05 MDBT42Q.12 26.82,41.9 27.02,42.1 27.02,41.9 | MDBT42Q.39 15.37,57.33 14.81,57.89 PROG.4 13.25,59.49 12,60.74 12,63.98 13.46,65.44 | C13.1 C12.1 32.02,42.42 31.8,42.2 27.32,42.2 27.02,41.9 | v38.85,43.55 38.8,43.6 38.8,46.9 39.95,48.05 | LIS3DH.5 40.8,48.9 39.95,48.05 | 45.23,47.73 45.3,47.8 45.3,49.9 | 13.46,65.44 18.59,60.31 18.59,56.23 21.05,53.78 26.39,53.78 26.67,53.5 v26.7,53.5 26.82,53.38 MDBT42Q.24 | LIS3DH.10 44.8,49.4 45.3,49.9 | LIS3DH.12 44.9,50.4 45.3,50 45.3,49.9 | v45.23,47.77 45.23,47.73 | 45.23,47.73 45,47.5 43.3,47.5 LIS3DH.7 | C7.1 34.95,38.38 R15.2 34.95,35.3 34.84,35.2 | R16.1 34.84,33.69 C8.2 34.84,33.72 34.84,35.2 | 34.84,35.2 34.24,34.6 28.8,34.6 28.1,35.3 28.1,37.75 28,37.85 | SGP30.4 41.6,34.46 SGP30.DIEPAD | 28,37.85 26.65,37.85 26.25,37.45 OPAMP.4 | BME280.1 43.95,45.77 43.31,46.4 40.4,46.4 39.95,46.85 39.95,48.05 | 27.02,41.9 C11.1 | SGP30.DIEPAD 42.4,32.3 42.8,31.9 42.8,31.13 C10.1 | SGP30.DIEPAD 42.4,36.7 v43.1,37.4
  Bottom 0.254: VR_3.3.8 VR_3.3.7 VR_3.3.6 VR_3.3.5 31.62,45.88 32.9,44.6 | C4.1 32.9,44.6 | 23.75,48.3 VR_5.1 | 23.75,48.3 23.2,48.3 22.4,47.5 22.4,45.4 23.1,44.7 26.3,44.7 27.2,45.6 C2.2 | 49.05,50.3 49.76,49.6 49.76,48.4 49.19,47.83 48.31,47.83 48.24,47.77 | 49.05,50.3 24.17,50.3 C1.2 23.75,49.18 23.75,48.3 | 49.05,50.3 49.01,50.35 48.12,50.35 47,51.46 47,54 43,58 41.69,58 BT4.- 38.89,60.43 35.36,56.9 v33.86,56.9 33,56.9 29.6,53.5 v26.7,53.5 | 44.4,39.4 45.4,39.4 46.6,40.6 46.6,46.12 48.24,47.77 | v43.1,37.4 44.4,38.7 44.4,39.4 | 41.8,41.23 41.87,41.16 40.7,40 v30.3,40 29.2,38.9 26.7,38.9 26.1,39.5 29.4,42.8 C9.2 31.18,43.17 R20.1 31.45,43.16 32.9,44.6 | 44.4,39.4 43.53,39.4 41.8,41.13 41.8,41.23 | 48.24,47.77 v45.23,47.77 | 39.83,42.97 40.63,42.97 41.8,41.8 41.8,41.23 | 39.83,42.97 39.44,42.97 v38.85,43.55 38.33,44.07 C3.2 38.33,46.6 C5.1 39.47,47.4 VR_1.8.2 | C6.1 41.77,44.9 39.83,42.97
  other vias: 18.7,50.6 19.7,49.6 18.7,48.6 19.7,47.6 18.7,46.6 19.7,45.6 18.7,44.6 17.7,45.6 16.7,44.6 15.7,45.6 45.4,45.8 39.5,46.4 36.5,44.6 35.1,43.6 30.5,48.7 28.7,48.7 35.8,50.3 32.8,44.6 41.3,45.2 26.8,55.4 29.3,56 41.3,43.7 44.8,42.5
  pour Top: 51,68 51,27 15,27.1 15,46.7 18.1,46.61 18.1,51.2 14.9,51.2 14.9,57.8 12,57.8 12,68 18,68 19.8,66.2 30.7,66.2 32.5,68
  pour Bottom: 12.3,27 51,27 51,68 32.5,68 30.7,66.2 19.8,66.2 18,68 11.4,68 11.4,57.3 15.2,57.3 15.2,51.3 18.2,51.3 18.2,46.6 15.1,46.6 15.1,37.1 12.3,37.1
LED  (via drill 0.35)
  Top 0.254: MDBT42Q.23 29.75,50.75 v30,51 | LED.+ 47.25,54.25 v45.77,52.77
  Bottom 0.254: v45.77,52.77 44,51 v30,51
N$2
  Bottom 0.254: BT2.S+1 17.14,31.9 26.2,31.9 28.95,34.65 BT2.S+2 28.99,34.85 33.04,38.9 38.1,38.9 40,37 40.14,36.86 BT1.-
N$4
  Bottom 0.254: BT3.S+1 28.06,60.54 24.5,64.1 16.81,64.1 13.46,60.75 BT3.S+2 20.6,53.3 20.6,35 20.95,34.65 BT2.-
N$6
  Top 0.254: OPAMP.5 26.25,31.75 24.9,33.1 20,33.1 19.16,32.26 MICS6814.A
N$7
  Top 0.254: OPAMP.6 OPAMP.7 28.8,31.59 29.2,32 32.05,32 R14.2
N$8
  Top 0.254: OPAMP.2 OPAMP.1 30.07,36.23 30.3,36 32.15,36 R13.2
N$9
  Top 0.254: R18.2 LED.-
N$10
  Top 0.254: OPAMP.3 27.52,35.83 25.8,34.1 20,34.1 19.16,34.94 MICS6814.H
N$11
  Top 0.254: MICS6814.G 20.4,37.4 20.6,37.6 22.49,37.6 R12.1
N$13
  Top 0.254: R11.1 16.1,33.5 MICS6814.K
N$14
  Bottom 0.254: VR_3.3.4 35.98,45.38 35.2,44.6 C4.2
N$15
  Top 0.254: R17.2 19.74,39.79 19.55,39.98 BJT.1
N$17
  Top 0.152: MDBT42Q.13 29.3,43.75 CRYST.2 30.93,43.55 C12.2
N$18
  Top 0.152: CRYST.1 29.7,44.65 29.6,44.55 | 29.6,44.55 30.93,44.55 C13.2 | MDBT42Q.14 29.5,44.45 29.6,44.55
N$25
  Bottom 0.254: BT4.S+1 43.09,63.9 35.5,63.9 32.03,60.43 BT4.S+2 27.53,56 24,56 20.76,59.24 BT3.-
N$27
  Bottom 0.254: BT1.S+1 32.94,34.65 37.19,30.4 43.2,30.4 BT1.S+2 47.2,34.89 47.2,45.4 S1.2
P8
  Top 0.254: MDBT42Q.4 19.77,41.79 20.75,40.81 R17.1
SCL
  Top 0.152: 39.16,41 37.16,43 37.16,46.6 | 39.16,41 42.5,41 44.45,42.95 BME280.4 | 37.06,47.2 37.06,52.04 35.5,53.6 | 35.5,53.6 41,53.6 41.9,54.5 SCD41.9 | 35.5,53.6 32.96,53.6 R8.2 32.66,55.02 Q4.2 | LIS3DH.4 39.96,49.4 37.16,46.6 | 37.06,47.2 37.06,46.5 37.16,46.6 | 37.06,47.2 36.31,47.95 MDBT42Q.19 | Q1.3 41,39.16 R4.2 39.16,41
SCL5
  Top 0.152: Q4.3 31.29,57.56 R7.2 26.54,57.56 25.2,58.9 SPS30.3
SCL18
  Top 0.152: SGP30.6 41.13,32.74 R3.2 39.36,32.74 38.9,33.2 38.9,36.12 Q1.2
SDA  (via drill 0.35)
  Top 0.152: 45.3,44.7 45.3,40.5 46.56,39.24 R6.1 46.56,36.75 Q2.3 | 46.1,47.7 46.1,45.5 45.3,44.7 | 46.1,47.7 46.1,51.2 44.7,52.6 42,52.6 | 42,52.6 v37.9,52.6 | 34.6,51.4 34.6,49.9 34.05,49.35 MDBT42Q.21 | 34.6,51.4 v34.6,52.6 | 34.6,51.4 34,52 31,52 28.8,54.2 R10.1 28.17,54.87 Q3.2 | SCD41.10 43.15,53.75 42,52.6 | 46.1,47.7 45.3,46.9 43.2,46.9 42.8,47.3 LIS3DH.6 | BME280.3 45.06,44.47 45.3,44.7
  Bottom 0.152: v37.9,52.6 v34.6,52.6
SDA5
  Top 0.152: SPS30.2 23.7,57.8 22.46,56.56 R9.1 24.01,56.56 Q3.3
SDA18
  Top 0.152: SGP30.3 44.7,34.46 R5.1 45.2,34.96 46.88,34.96 47.89,33.95 Q2.2
SWDCLK
  Top 0.254: PROG.3 17.67,59.31 MDBT42Q.36
SWDIO
  Top 0.254: PROG.2 13.25,60.55 16.97,56.83 MDBT42Q.37
VDD
  Bottom 0.254: S1.1 47.6,48.9 46.8,49.7 36.7,49.7 | VR_3.3.2 VR_3.3.1 35.98,48.98 36.7,49.7 | 29.1,49.7 36.7,49.7 | R19.1 29.7,49.1 29.1,49.7 | 29.1,49.7 25.13,49.7 C1.1 25.03,48.51 VR_5.2
(copper drawn outside any net)
  shapes: Top area x2

## Text on the board
tPlace: D | SPS30 | C
bPlace: ENVIRONMENTAL / WEARABLE / MONITOR | LARES 2022 | C4